# EAGLE board chipchestra-v05-actuators (EAGLE 8.0.0)
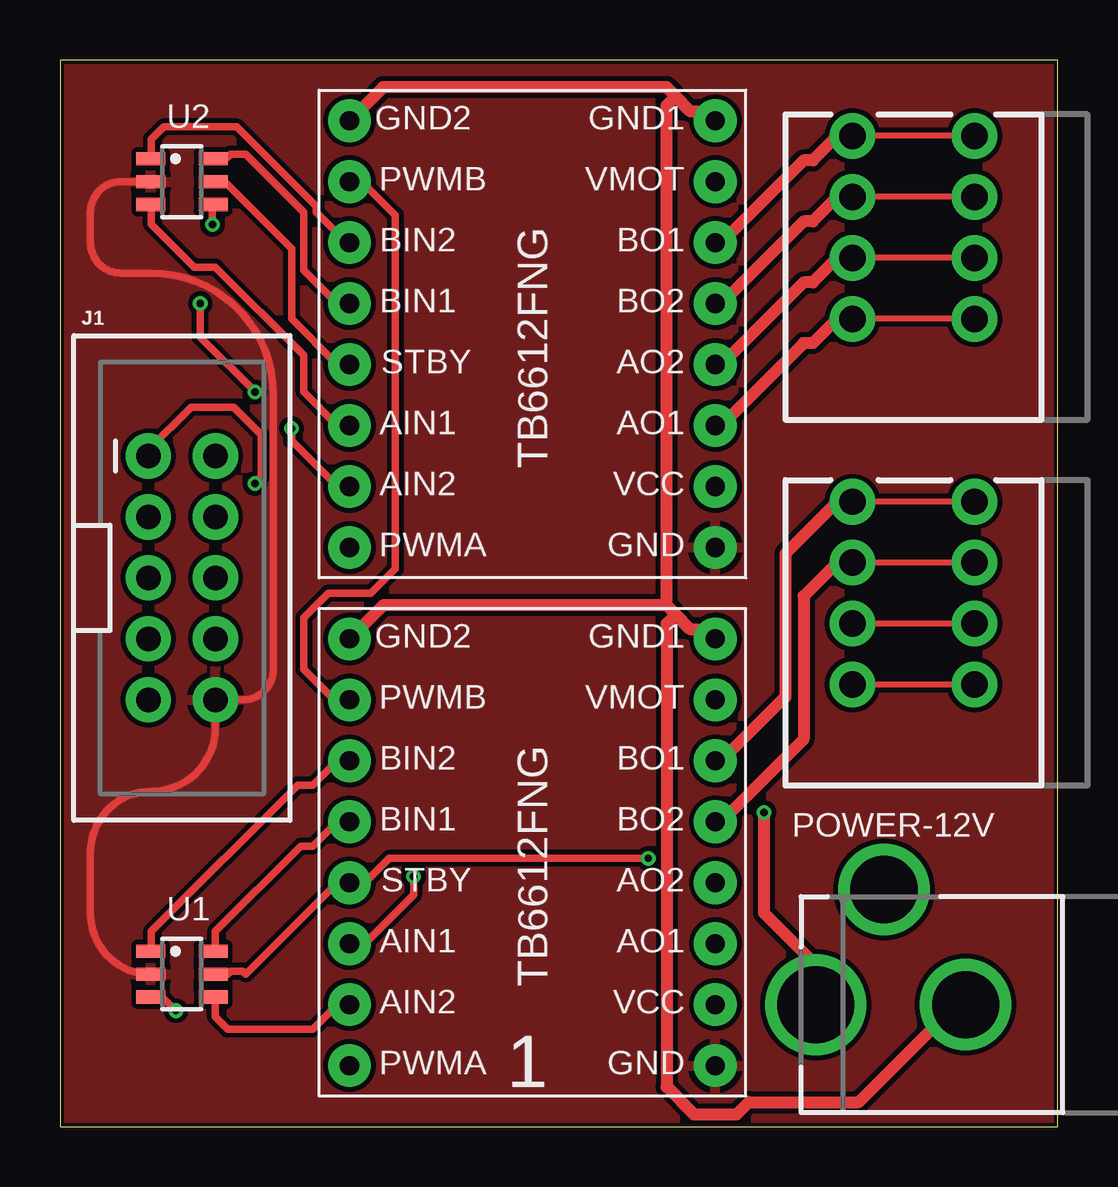
[diagram p0: board, top side]
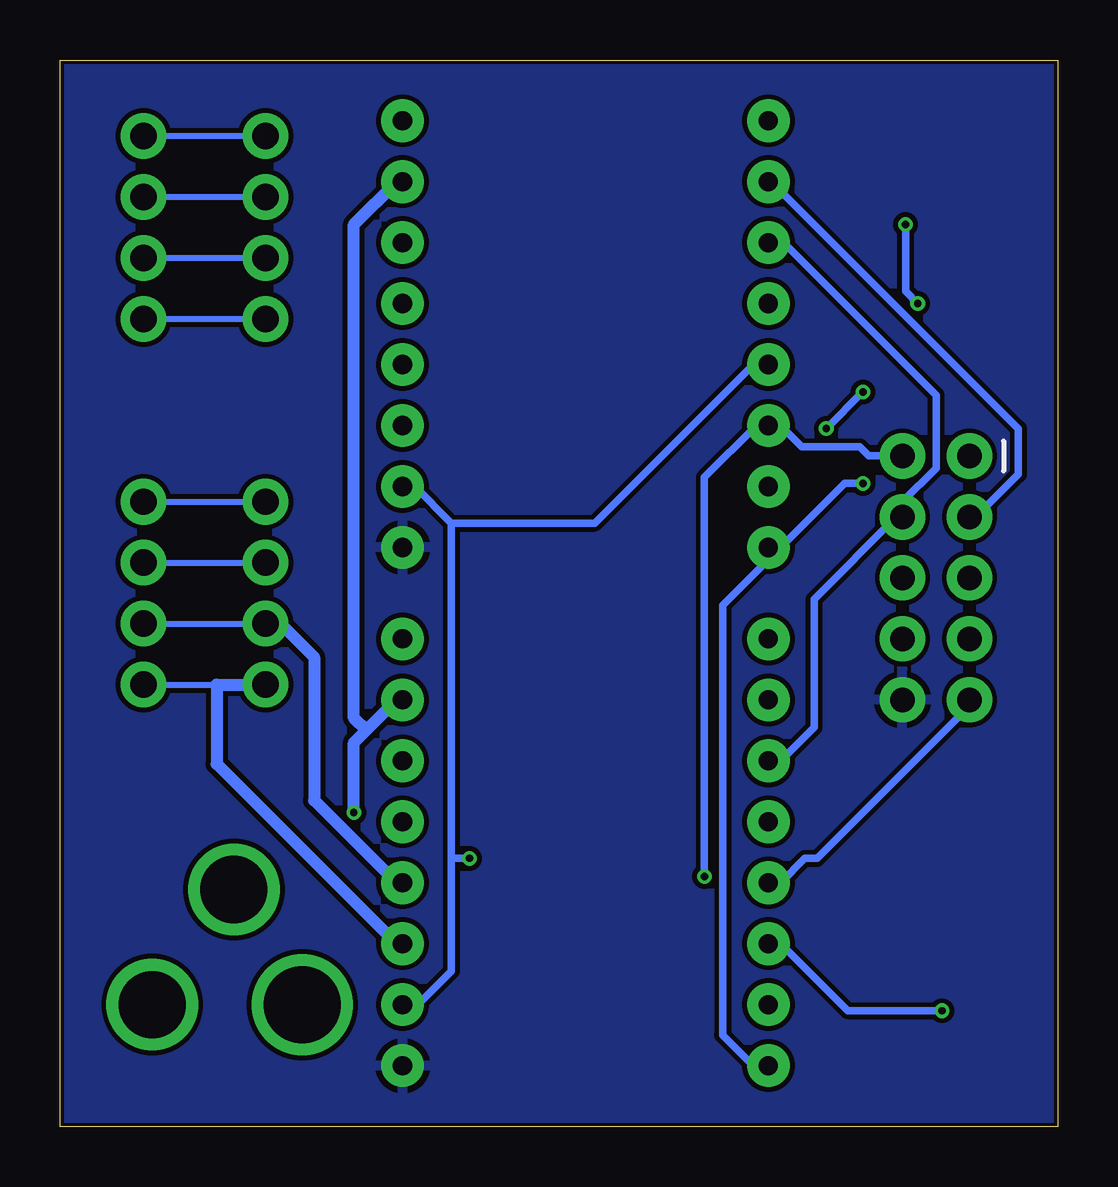
[diagram p1: board, bottom side, seen from below]

Size 41.58 x 44.44 mm. Coordinates in mm from the lower left corner, seen from the top.
Outline: 0,0 41.58,0 41.58,44.44 0,44.44 0,0
Copper layers (1*16): Top 0.035mm / dielectric 1.5mm / Bottom 0.035mm
Design rules "default *": minimum track width 12mil, minimum drill 12mil, track to track 8mil, track to pad 8mil, pad to pad 8mil, via to via 8mil, smd to smd 8mil, copper to edge 6mil, drill to drill 6mil, minimum pad ring 6mil, minimum via ring 6mil, stop-mask expansion 4mil, vias tented up to drill 0mil, thermal gap 10mil
Net classes: 0 default: width 0.305 mm, clearance 0.152 mm; 1 GND: width 0.508 mm, clearance 0.152 mm; 2 Power: width 0.508 mm, clearance 0.152 mm

## Footprints (pad centres in the part's own frame; a part is rotated, then mirrored left to right if it is on the bottom)
2X5-SHROUDED_LOCK = drill 1.016 pad 1.88: 1 -1.397,5.08; 2 1.397,5.08; 3 -1.397,2.54; 4 1.397,2.54; 5 -1.397,0; 6 1.397,0; 7 -1.397,-2.54; 8 1.397,-2.54; 9 -1.397,-5.08; 10 1.397,-5.08
SPRINGTERMINAL-2.54MM-4 = drill 1.1 pad 1.9: 1 7.62,-2.54; 2 5.08,-2.54; 3 2.54,-2.54; 4 0,-2.54; P$1 7.62,2.54; P$2 5.08,2.54; P$3 2.54,2.54; P$4 0,2.54
DCJACK_2MM_PTH = drill 2.8: GND 0,7.35; GNDBREAK 4.8,10.75 | drill 3.2: PWR 0,13.6
SOT23-6 = smd 0.55 x 1.2: 1 -0.95,-1.3; 2 0,-1.3; 3 0.95,-1.3; 4 0.95,1.3; 5 0,1.3; 6 -0.95,1.3
POLOLU_TB6612FNG = drill 0.8 pad 1.778: AIN1 7.62,3.81; AIN2 7.62,6.35; AO1 -7.62,3.81; AO2 -7.62,1.27; BIN1 7.62,-1.27; BIN2 7.62,-3.81; BO1 -7.62,-3.81; BO2 -7.62,-1.27; GND -7.62,8.89; GND1 -7.62,-8.89; GND2 7.62,-8.89; PWMA 7.62,8.89; PWMB 7.62,-6.35; STBY 7.62,1.27; VCC -7.62,6.35; VMOT -7.62,-6.35

## Placement (x,y rotation side)
J1  [2X5-SHROUDED_LOCK]  5.08,22.86 0 top
MOTORS1  [SPRINGTERMINAL-2.54MM-4]  35.56,18.41 90 top
MOTORS2  [SPRINGTERMINAL-2.54MM-4]  35.56,33.66 90 top
POWER-12V  [DCJACK_2MM_PTH]  45.09,5.08 90 top
U1  SN74LVC2G04DBV  [SOT23-6]  5.08,6.35 270 top
U2  SN74LVC2G04DBV  [SOT23-6]  5.08,39.37 270 top
U$1  POLOLU_TB6612FNG  [POLOLU_TB6612FNG]  19.68,33.02 180 top
U$7  POLOLU_TB6612FNG  [POLOLU_TB6612FNG]  19.68,11.43 180 top

## Library data of the parts
J1 = SparkFun-Connectors; PROD_ID: CONN-08671; SF_ID: PRT-08506
MOTORS1 = CMU-ArtFab; MOTORS_1A-1B: MOTORS_1A-1B
MOTORS2 = CMU-ArtFab; MOTORS_2A-2B: MOTORS_2A-2B
POWER-12V = adafruit
U1 U2 = 74LV
U$1 = CMU-ArtFab; 2: 2
U$7 = CMU-ArtFab; 1: 1

## Nets
GND: J1.10 U1.2 U2.2 U$1.GND U$7.GND
GND_MOT [Power]: POWER-12V.GND U$1.GND1 U$1.GND2 U$7.GND1 U$7.GND2
GNDBREAK: POWER-12V.GNDBREAK
MOT_AIN_1: J1.2 U1.3 U2.3 U$1.AIN1 U$7.AIN1
MOT_AIN_2: J1.6
MOT_BIN_1: J1.4 U1.1 U2.1 U$1.BIN2 U$7.BIN2
MOT_BIN_2: J1.8
MOT_PWMA_1: J1.1 U$1.PWMA U$7.PWMA
MOT_PWMA_2: J1.5
MOT_PWMB_1: J1.3 U$1.PWMB U$7.PWMB
MOT_PWMB_2: J1.7
N$1 [Power]: MOTORS2.P$1 U$1.BO1
N$2 [Power]: MOTORS2.P$2 U$1.BO2
N$3 [Power]: MOTORS2.P$3 U$1.AO2
N$4 [Power]: MOTORS2.P$4 U$1.AO1
N$5: U1.6 U$7.BIN1
N$6: U1.4 U$7.AIN2
N$7: U2.6 U$1.BIN1
N$8: U2.4 U$1.AIN2
N$45 [Power]: MOTORS1.P$1 U$7.BO1
N$46 [Power]: MOTORS1.P$2 U$7.BO2
N$52 [Power]: MOTORS1.P$3 U$7.AO2
N$54 [Power]: MOTORS1.P$4 U$7.AO1
VCC: J1.9 U1.5 U2.5 U$1.STBY U$1.VCC U$7.STBY U$7.VCC
VMOT [Power]: POWER-12V.PWR U$1.VMOT U$7.VMOT

## Tracks (layer width: path | path; a pad name or v marks a point on that pad's centre or on a via)
GND
  Top 0.305: U1.2 arc-90 1.27,8.86 1.27,11.43 arc-90 3.81,13.97 arc90 6.48,16.64 J1.10 7.62,17.78 arc90 8.89,19.05 8.89,30.48 arc90 3.81,35.56 2.54,35.56 arc-90 1.27,36.83 1.27,38.1 arc-90 2.54,39.37 U2.2
  pour Bottom: 0,0 41.91,0 41.91,44.45 0,44.45
  pour Top: 0,0 41.91,0 41.91,44.45 0,44.45
GND_MOT
  Top 0.508: U$1.GND2 13.46,43.31 25.27,43.31 25.65,42.93 | 25.65,42.93 26.29,42.29 26.54,42.29 26.92,41.91 U$1.GND1 | U$7.GND2 13.46,21.72 25.27,21.72 | 25.65,21.34 26.29,20.7 26.54,20.7 26.92,20.32 U$7.GND1 | 25.65,21.34 25.27,21.72 | POWER-12V.GND 37.34,5.08 33.27,1.02 28.7,1.02 28.19,0.51 26.42,0.51 25.27,1.65 25.27,20.95 25.65,21.34 | 25.65,42.93 25.27,42.55 25.27,21.72
MOT_AIN_1  (via drill 0.3)
  Top 0.305: v4.83,4.83 4.32,5.33 3.81,5.33 U1.3 | U$1.AIN1 11.56,29.21 10.16,30.61 10.16,32.13 6.48,35.81 5.59,35.81 3.81,37.59 3.81,38.35 U2.3 | U$7.AIN1 12.7,7.62 14.73,9.65 v14.73,10.41
  Bottom 0.305: v4.83,4.83 8.76,4.83 11.56,7.62 U$7.AIN1 | J1.2 7.87,27.94 8.26,28.32 10.67,28.32 11.56,29.21 U$1.AIN1 12.57,29.21 14.73,27.05 v14.73,10.41
MOT_BIN_1
  Top 0.305: U$1.BIN2 11.94,36.83 10.67,38.1 10.67,38.35 7.37,41.66 4.32,41.66 3.81,41.15 3.81,40.39 U2.1 | U$7.BIN2 11.56,15.24 10.54,14.22 9.91,14.22 3.81,8.13 3.81,7.37 U1.1
  Bottom 0.305: U$7.BIN2 11.56,15.24 10.16,16.64 10.16,21.97 6.73,25.4 J1.4 6.48,26.04 5.08,27.43 5.08,30.48 11.43,36.83 U$1.BIN2
MOT_PWMA_1  (via drill 0.3)
  Top 0.305: J1.1 3.68,28.19 5.46,29.97 7.24,29.97 8.38,28.83 8.38,27.05 v8.13,26.8
  Bottom 0.305: U$7.PWMA 12.7,2.54 13.97,3.81 13.97,21.72 12.06,23.62 U$1.PWMA 11.56,24.13 8.89,26.8 v8.13,26.8
MOT_PWMB_1
  Top 0.305: U$7.PWMB 11.43,17.78 10.16,19.05 10.16,21.21 11.18,22.23 12.95,22.23 13.97,23.24 13.97,37.97 12.57,39.37 U$1.PWMB
  Bottom 0.305: J1.3 3.43,25.4 1.65,27.18 1.65,29.08 11.94,39.37 U$1.PWMB
N$1
  Top 0.508: U$1.BO1 27.56,36.83 30.99,40.26 31.37,40.26 32.38,41.27 MOTORS2.P$1
N$2
  Top 0.508: U$1.BO2 27.56,34.29 30.99,37.72 31.37,37.72 32.38,38.73 MOTORS2.P$2
N$3
  Top 0.508: U$1.AO2 27.56,31.75 30.99,35.18 31.37,35.18 32.38,36.2 MOTORS2.P$3
N$4
  Top 0.508: U$1.AO1 27.56,29.21 30.99,32.64 31.37,32.64 32.38,33.66 MOTORS2.P$4
N$5
  Top 0.305: U$7.BIN1 11.56,12.7 10.54,11.68 10.03,11.68 6.48,8.13 6.48,7.37 U1.6
N$6
  Top 0.305: U$7.AIN2 11.56,5.08 10.54,4.06 6.99,4.06 6.48,4.57 6.48,5.33 U1.4
N$7
  Top 0.305: U$1.BIN1 11.56,34.29 10.16,35.69 10.16,38.1 7.75,40.51 7.11,40.51 6.99,40.39 6.48,40.39 U2.6
N$8  (via drill 0.3)
  Top 0.305: v6.35,37.59 6.35,38.35 U2.4 | v5.84,34.29 5.84,32.89 v8.13,30.61 | v9.65,29.08 9.65,28.57 11.56,26.67 U$1.AIN2
  Bottom 0.305: v6.35,37.59 6.35,34.8 v5.84,34.29 | v9.65,29.08 v8.13,30.61
N$45
  Top 0.508: U$7.BO1 27.56,15.24 30.23,17.91 30.23,23.88 32.38,26.04 MOTORS1.P$1
N$46
  Top 0.508: U$7.BO2 27.56,12.7 30.99,16.13 30.99,22.1 32.38,23.5 MOTORS1.P$2
N$52
  Bottom 0.508: U$7.AO2 27.56,10.16 30.99,13.59 30.99,19.56 32.38,20.95 MOTORS1.P$3
N$54
  Bottom 0.508: U$7.AO1 27.56,7.62 35.05,15.11 35.05,18.41 MOTORS1.P$4
VCC  (via drill 0.3)
  Top 0.305: U1.5 6.99,6.35 7.11,6.48 7.62,6.48 7.75,6.35 11.56,10.16 U$7.STBY 12.7,10.16 13.72,11.18 v24.51,11.18 | U2.5 6.86,39.37 9.65,36.58 9.65,33.66 11.56,31.75 U$1.STBY
  Bottom 0.305: J1.9 3.68,17.53 10.03,11.18 10.54,11.18 11.56,10.16 U$7.STBY | U$7.VCC 26.67,5.08 25.27,6.48 25.27,11.18 | 25.27,25.15 25.27,11.18 | 25.27,25.15 26.8,26.67 U$1.VCC | U$1.STBY 12.7,31.75 19.3,25.15 25.27,25.15 | 25.27,11.18 v24.51,11.18
VMOT  (via drill 0.3)
  Top 0.508: v29.34,13.08 29.34,8.89 31.37,6.86 31.37,5.08 POWER-12V.PWR
  Bottom 0.508: U$7.VMOT 27.56,17.78 28.83,16.51 | 28.83,16.51 29.34,16 v29.34,13.08 | U$1.VMOT 27.56,39.37 29.34,37.59 29.34,17.02 28.83,16.51